# Altium PCB Copy of WoodStoveLayout1.PcbDoc (part 4 of 5)
Units mil, origin at the board's own origin, x right, y up, seen from the top; angles counter-clockwise.
Board outline 4000 x 3000 mil, 4 copper layers (Top Layer, LGND, LPWR, Bottom Layer), stack 64.6 mil thick; 132 components, 92 nets, 551 pads, 393 vias.
Unrouted connection lines stored in the file: 127.
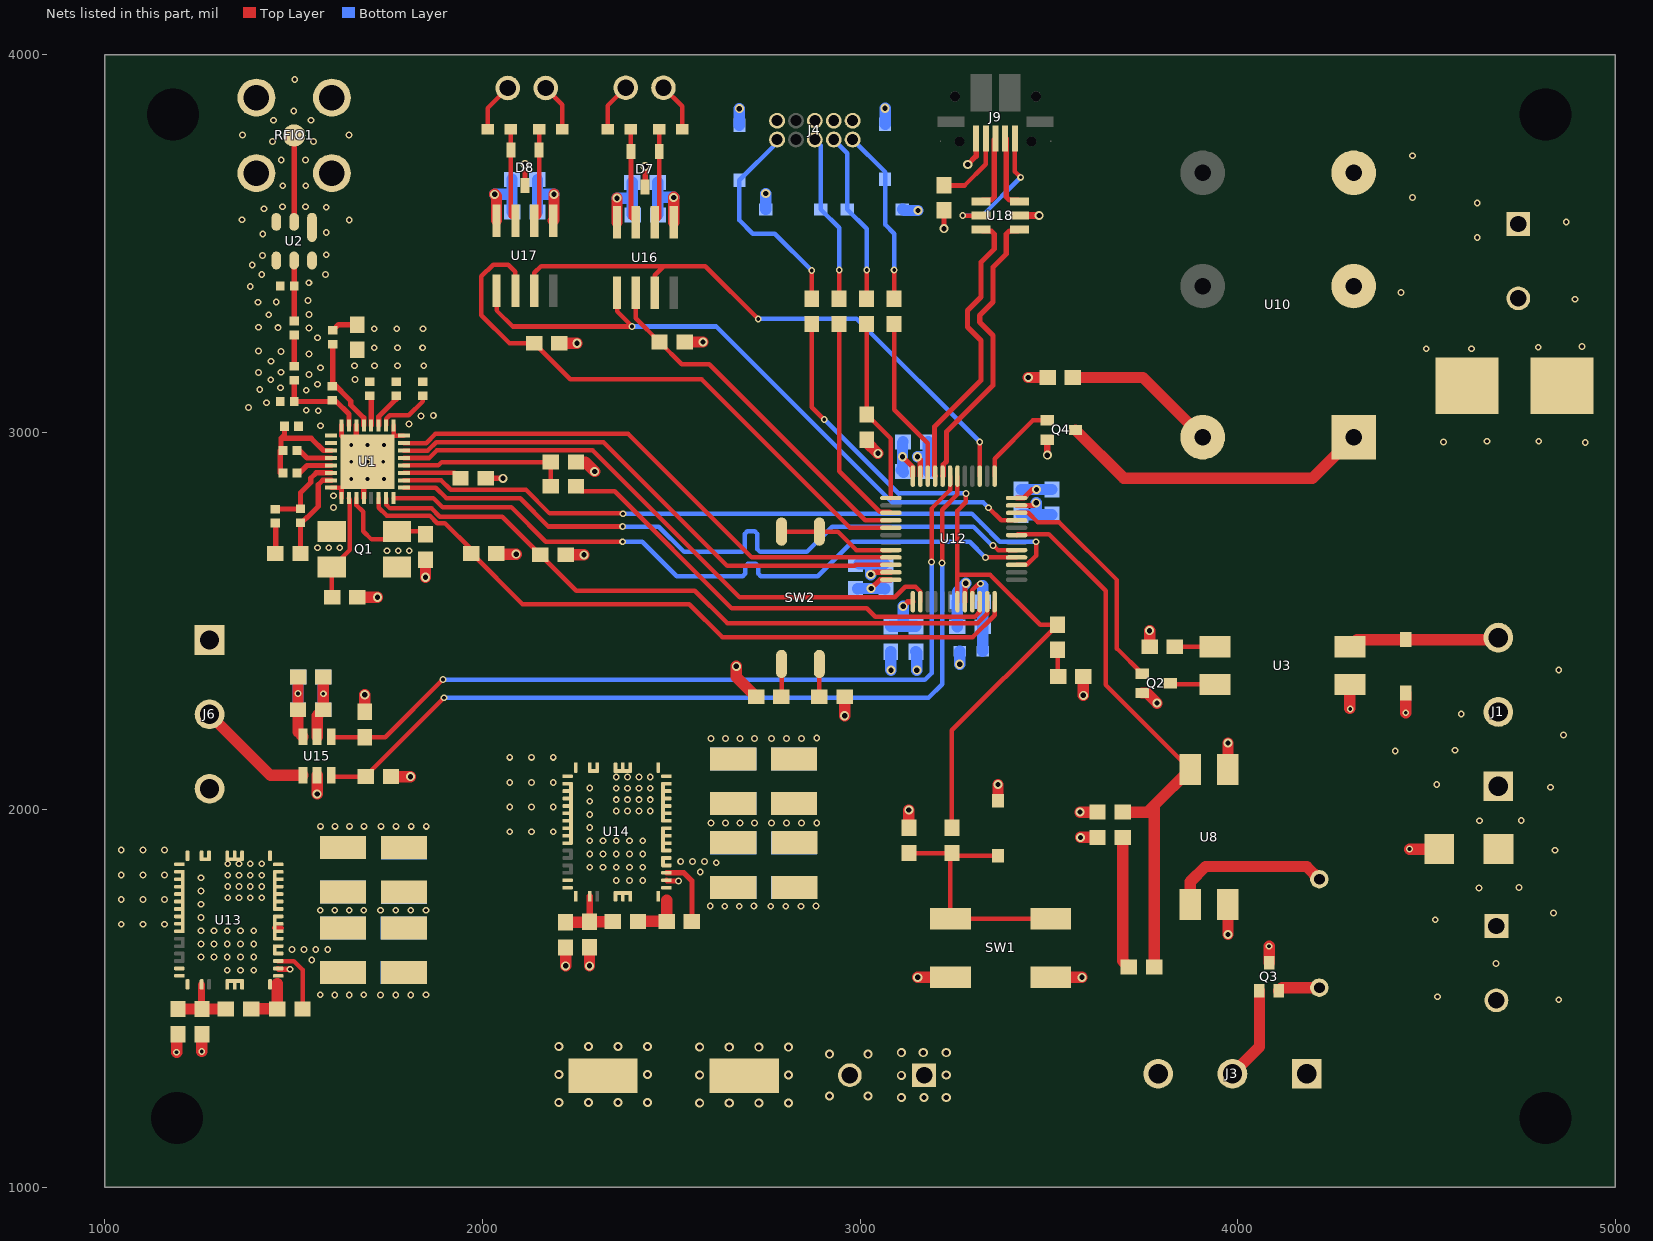
[diagram p4: the nets of this part, all layers, seen from the top]

## Part data (continued)
R11: Case/Package=0603, Case Code (Metric)=1608, Manufacturer=Vishay, Manufacturer Part Number=CRCW060368R0FKEA, Max Operating Temperature=155°C, Max Power Dissipation=100mW, Min Operating Temperature=-55°C, Package Quantity=10, Resistance=68, Supplier Part Number 1=541-68.0HTR-ND, Temperature Coefficient=100ppm/°C, Tolerance=1%, Voltage Rating=75V, Case Code (Imperial)=0603, ComponentLink1Description=https://datasheet.ciiva.com/2494/dcrcwe3-2494368.pdf, ComponentLink1URL=https://datasheet.ciiva.com/2494/dcrcwe3-2494368.pdf, ComponentLink2Description=https://datasheet.ciiva.com/11809/0900766b80d98afc-11809013.pdf, ComponentLink2URL=https://datasheet.ciiva.com/11809/0900766b80d98afc-11809013.pdf, ComponentLink3Description=https://datasheet.ciiva.com/8337/dcrcwe3-8337350.pdf, ComponentLink3URL=https://datasheet.ciiva.com/8337/dcrcwe3-8337350.pdf, ComponentLink4Description=https://datasheet.ciiva.com/7777/1697337-7777608.pdf, ComponentLink4URL=https://datasheet.ciiva.com/7777/1697337-7777608.pdf, ComponentLink5Description=https://datasheet.ciiva.com/16770/70201119-16770904.pdf, ComponentLink5URL=https://datasheet.ciiva.com/16770/70201119-16770904.pdf, ComponentLink6Description=https://datasheet.ciiva.com/2494/dcrcwe3-2494366.pdf, ComponentLink6URL=https://datasheet.ciiva.com/2494/dcrcwe3-2494366.pdf, ComponentLink7Description=https://datasheet.ciiva.com/22870/70201119-22870302.pdf, ComponentLink7URL=https://datasheet.ciiva.com/22870/70201119-22870302.pdf, ComponentLink8Description=https://datasheet.ciiva.com/2494/dcrcwe3-2494367.pdf, ComponentLink8URL=https://datasheet.ciiva.com/2494/dcrcwe3-2494367.pdf, ComponentLink9Description=https://datasheet.ciiva.com/16200/dcrcw-16200591.pdf, ComponentLink9URL=https://datasheet.ciiva.com/16200/dcrcw-16200591.pdf, Composition="Thick Film", Contact Plating=Tin, Depth=0.85mm, Height=0.45mm, Lead Free="Lead Free", Length=1.55mm, Military Standard=Not, Number of Terminations=2, Packaging="Tape and Reel", Power Rating=100mW, Pricing 1="5000=0.00497, 10000=0.00432, 25000=0.00405 (USD)", Radiation Hardening=No, REACH SVHC=Unknown, Stock 1=0, Supplier 1=Digi-Key, Termination=SMD/SMT, Voltage Rating (DC)=75V, Weight=7.1E-05oz, Width=0.033inch
R13 R14 R15 R16 R24 R25: Case/Package=0603, Case Code (Metric)=1608, Manufacturer=Vishay, Manufacturer Part Number=CRCW060322R0FKEA, Max Operating Temperature=155°C, Min Operating Temperature=-55°C, Package Quantity=5000, Power Rating=100mW, Resistance=22R, Supplier Part Number 1=541-22.0HTR-ND, Temperature Coefficient=100ppm/°C, Tolerance=1%, Voltage Rating=75V, Case Code (Imperial)=0603, ComponentLink1Description=https://datasheet.ciiva.com/16382/dcrcwe3-16382261.pdf, ComponentLink1URL=https://datasheet.ciiva.com/16382/dcrcwe3-16382261.pdf, ComponentLink2Description=https://datasheet.ciiva.com/5552/dcrcwe3-109170-5552120.pdf, ComponentLink2URL=https://datasheet.ciiva.com/5552/dcrcwe3-109170-5552120.pdf, ComponentLink3Description=https://datasheet.ciiva.com/22700/1697337-22700361.pdf, ComponentLink3URL=https://datasheet.ciiva.com/22700/1697337-22700361.pdf, ComponentLink4Description=https://datasheet.ciiva.com/11809/0900766b80d98afc-11809067.pdf, ComponentLink4URL=https://datasheet.ciiva.com/11809/0900766b80d98afc-11809067.pdf, ComponentLink5Description=https://datasheet.ciiva.com/7672/1697337-7672876.pdf, ComponentLink5URL=https://datasheet.ciiva.com/7672/1697337-7672876.pdf, ComponentLink6Description=https://datasheet.ciiva.com/15159/getdatasheetpartid-33090-15159388.pdf, ComponentLink6URL=https://datasheet.ciiva.com/15159/getdatasheetpartid-33090-15159388.pdf, ComponentLink7Description=https://datasheet.ciiva.com/7672/1697337-7672877.pdf, ComponentLink7URL=https://datasheet.ciiva.com/7672/1697337-7672877.pdf, ComponentLink8Description=https://datasheet.ciiva.com/26316/fld-crcw-e3-data-en-26316590.pdf, ComponentLink8URL=https://datasheet.ciiva.com/26316/fld-crcw-e3-data-en-26316590.pdf, ComponentLink9Description=https://datasheet.ciiva.com/16893/dcrcw-16893903.pdf, ComponentLink9URL=https://datasheet.ciiva.com/16893/dcrcw-16893903.pdf, Composition="Thick Film", Contact Plating=Tin,Lead, Depth=0.85mm, Height=0.45mm, Lead Free="Lead Free", Length=1.55mm, Military Standard=Not, Mount="Surface Mount", Packaging="Tape and Reel", Pricing 1="5000=0.00497, 10000=0.00432, 25000=0.00405 (USD)", Radiation Hardening=No, REACH SVHC=Unknown, Stock 1=0, Supplier 1=Digi-Key, Termination=SMD/SMT, Voltage Rating (DC)=75V, Weight=7.1E-05oz, Width=0.85mm
R22: Case/Package=0603, Case Code (Metric)=1608, Manufacturer=Vishay, Manufacturer Part Number=CRCW060310R0FKEA, Max Operating Temperature=155°C, Max Power Dissipation=100mW, Min Operating Temperature=-55°C, Package Quantity=10, Supplier Part Number 1=541-10.0HTR-ND, Temperature Coefficient=100ppm/°C, Tolerance=1%, Voltage Rating=75V, Case Code (Imperial)=0603, ComponentLink1Description=https://datasheet.ciiva.com/2465/dcrcwe3-2465699.pdf, ComponentLink1URL=https://datasheet.ciiva.com/2465/dcrcwe3-2465699.pdf, ComponentLink2Description=https://datasheet.ciiva.com/2465/dcrcwe3-2465700.pdf, ComponentLink2URL=https://datasheet.ciiva.com/2465/dcrcwe3-2465700.pdf, ComponentLink3Description=https://datasheet.ciiva.com/11808/0900766b80d98afc-11808660.pdf, ComponentLink3URL=https://datasheet.ciiva.com/11808/0900766b80d98afc-11808660.pdf, ComponentLink4Description=https://datasheet.ciiva.com/2465/dcrcwe3-2465701.pdf, ComponentLink4URL=https://datasheet.ciiva.com/2465/dcrcwe3-2465701.pdf, ComponentLink5Description=https://datasheet.ciiva.com/16740/dcrcwe3-16740661.pdf, ComponentLink5URL=https://datasheet.ciiva.com/16740/dcrcwe3-16740661.pdf, ComponentLink6Description=https://datasheet.ciiva.com/26316/fld-crcw-e3-data-en-26316582.pdf, ComponentLink6URL=https://datasheet.ciiva.com/26316/fld-crcw-e3-data-en-26316582.pdf, ComponentLink7Description=https://datasheet.ciiva.com/16781/70201119-16781847.pdf, ComponentLink7URL=https://datasheet.ciiva.com/16781/70201119-16781847.pdf, ComponentLink8Description=https://datasheet.ciiva.com/3256/dcrcwe3-3256955.pdf, ComponentLink8URL=https://datasheet.ciiva.com/3256/dcrcwe3-3256955.pdf, ComponentLink9Description=https://datasheet.ciiva.com/5547/dcrcwe3-109170-5547342.pdf, ComponentLink9URL=https://datasheet.ciiva.com/5547/dcrcwe3-109170-5547342.pdf, ComponentLink10Description=https://datasheet.ciiva.com/22673/1697337-22673071.pdf, ComponentLink10URL=https://datasheet.ciiva.com/22673/1697337-22673071.pdf, Composition="Thick Film", Contact Plating=Tin, Depth=0.85mm, Height=0.45mm, Lead Free="Lead Free", Length=1.55mm, Military Standard=Not, Mount="Surface Mount", Number of Pins=2, Number of Terminations=2, Packaging="Tape and Reel", Power Rating=100mW, Pricing 1="5000=0.00497, 10000=0.00432, 25000=0.00405 (USD)", REACH SVHC=Unknown, Resistance=10, Stock 1=0, Supplier 1=Digi-Key, Termination=SMD/SMT, Voltage Rating (DC)=75V, Weight=7.1E-05oz, Width=0.033inch
R29: Case/Package=0603, Case Code (Metric)=1608, Manufacturer="Vishay Dale", Manufacturer Part Number=M55342E12B40B2RWS, Max Operating Temperature=150°C, Max Power Dissipation=100mW, Min Operating Temperature=-55°C, Package Quantity=1, Resistance=40.2k, Supplier Part Number 1=M55342E12B40B2RWS-MIL, Temperature Coefficient=25ppm/°C, Tolerance=0.1%, Case Code (Imperial)=0603, ComponentLink1Description=https://datasheet.ciiva.com/16884/crcwhpe3-16884389.pdf, ComponentLink1URL=https://datasheet.ciiva.com/16884/crcwhpe3-16884389.pdf, ComponentLink2Description=https://datasheet.ciiva.com/9010/crcwhpe3-9010219.pdf, ComponentLink2URL=https://datasheet.ciiva.com/9010/crcwhpe3-9010219.pdf, ComponentLink3Description=https://datasheet.ciiva.com/2527/crcwhpe3-2527276.pdf, ComponentLink3URL=https://datasheet.ciiva.com/2527/crcwhpe3-2527276.pdf, ComponentLink4Description=https://datasheet.ciiva.com/2527/crcwhpe3-2527277.pdf, ComponentLink4URL=https://datasheet.ciiva.com/2527/crcwhpe3-2527277.pdf, ComponentLink5Description=https://datasheet.ciiva.com/2527/crcwhpe3-2527278.pdf, ComponentLink5URL=https://datasheet.ciiva.com/2527/crcwhpe3-2527278.pdf, ComponentLink6Description=http://www.vishay.com/docs/60018/eh.pdf, ComponentLink6URL=http://www.vishay.com/docs/60018/eh.pdf, Composition="Thin Film", Failure Rate=0.01%, Height=0.033inch, Length=0.064inch, Number of Terminations=2, Packaging=Tray, Stock 1=0, Supplier 1=Digi-Key, Width=0.032inch
R30: Case/Package=0603, Case Code (Metric)=1608, Manufacturer="TE Connectivity", Manufacturer Part Number=8-2176089-5, Max Operating Temperature=155°C, Max Power Dissipation=167mW, Min Operating Temperature=-55°C, Package Quantity=1, Resistance=88.7k, Supplier Part Number 1=A110295TR-ND, Temperature Coefficient=25ppm/°C, Tolerance=0.1%, Case Code (Imperial)=0603, ComponentLink1Description=https://datasheet.ciiva.com/41810/eng-ds-1773272-j-41810143.pdf, ComponentLink1URL=https://datasheet.ciiva.com/41810/eng-ds-1773272-j-41810143.pdf, ComponentLink2Description=https://datasheet.ciiva.com/41821/eng-ds-1773272-j-41821583.pdf, ComponentLink2URL=https://datasheet.ciiva.com/41821/eng-ds-1773272-j-41821583.pdf, Composition="Thin Film", Height=0.022inch, Length=0.061inch, Number of Terminations=2, Packaging="Tape and Reel", Pricing 1="1000=0.14518, 2000=0.1432 (USD)", Stock 1=0, Supplier 1=Digi-Key, Width=0.031inch
R32: Case/Package=0603, Case Code (Metric)=1608, Manufacturer="TE Connectivity", Manufacturer Part Number=3-2176089-1, Max Operating Temperature=155°C, Max Power Dissipation=167mW, Min Operating Temperature=-55°C, Package Quantity=1000, Power Rating=166mW, Resistance=23.2kR, Supplier Part Number 1=A110239TR-ND, Temperature Coefficient=25ppm/°C, Tolerance=0.1%, Voltage Rating=100V, Case Code (Imperial)=0603, ComponentLink1Description=https://datasheet.ciiva.com/41825/eng-ds-1773272-j-41825125.pdf, ComponentLink1URL=https://datasheet.ciiva.com/41825/eng-ds-1773272-j-41825125.pdf, ComponentLink2Description=https://datasheet.ciiva.com/41807/eng-ds-1773272-j-41807015.pdf, ComponentLink2URL=https://datasheet.ciiva.com/41807/eng-ds-1773272-j-41807015.pdf, ComponentLink3Description=https://datasheet.ciiva.com/41818/eng-ds-1773272-j-41818073.pdf, ComponentLink3URL=https://datasheet.ciiva.com/41818/eng-ds-1773272-j-41818073.pdf, Composition="Thin Film", Height=0.022inch, Length=0.061inch, Mount="Surface Mount", Number of Terminations=2, Packaging="Cut Tape", Pricing 1="1000=0.14518, 2000=0.1432 (USD)", REACH SVHC="No SVHC", Stock 1=1000, Supplier 1=Digi-Key, Voltage Rating (DC)=100V, Width=0.031inch
R33: Case/Package=0603, Case Code (Metric)=1608, Manufacturer="TE Connectivity", Manufacturer Part Number=2176090-2, Max Operating Temperature=155°C, Max Power Dissipation=167mW, Min Operating Temperature=-55°C, Package Quantity=1000, Resistance=133kR, Supplier Part Number 1=A110312TR-ND, Temperature Coefficient=25ppm/°C, Tolerance=0.1%, Case Code (Imperial)=0603, ComponentLink1Description=https://datasheet.ciiva.com/41823/eng-ds-1773272-j-41823608.pdf, ComponentLink1URL=https://datasheet.ciiva.com/41823/eng-ds-1773272-j-41823608.pdf, ComponentLink2Description=https://datasheet.ciiva.com/41810/eng-ds-1773272-j-41810377.pdf, ComponentLink2URL=https://datasheet.ciiva.com/41810/eng-ds-1773272-j-41810377.pdf, ComponentLink3Description=https://datasheet.ciiva.com/41824/eng-ds-1773272-j-41824430.pdf, ComponentLink3URL=https://datasheet.ciiva.com/41824/eng-ds-1773272-j-41824430.pdf, Composition="Thin Film", Depth=0.8mm, Height=0.022inch, Length=0.061inch, Military Standard=Not, Number of Terminations=2, Packaging="Tape and Reel", Pricing 1="1000=0.14518, 2000=0.1432 (USD)", Stock 1=0, Supplier 1=Digi-Key, Width=0.031inch
R39: Case/Package=0603, Case Code (Metric)=1608, Manufacturer=Panasonic, Manufacturer Part Number=ERJ-3EKF1502V, Max Operating Temperature=155°C, Max Power Dissipation=100mW, Min Operating Temperature=-55°C, Package Quantity=1, Resistance=15k, Supplier Part Number 1=P15.0KHTR-ND, Temperature Coefficient=100ppm/°C, Tolerance=1%, Voltage Rating=75V, Case Code (Imperial)=0603, ComponentLink1Description=https://datasheet.ciiva.com/16770/70260748-16770997.pdf, ComponentLink1URL=https://datasheet.ciiva.com/16770/70260748-16770997.pdf, ComponentLink2Description=https://datasheet.ciiva.com/7830/426256-7830982.pdf, ComponentLink2URL=https://datasheet.ciiva.com/7830/426256-7830982.pdf, ComponentLink3Description=https://datasheet.ciiva.com/24026/aoa0000ce2-24026054.pdf, ComponentLink3URL=https://datasheet.ciiva.com/24026/aoa0000ce2-24026054.pdf, ComponentLink4Description=https://datasheet.ciiva.com/6138/aoa0000ce2-6138183.pdf, ComponentLink4URL=https://datasheet.ciiva.com/6138/aoa0000ce2-6138183.pdf, ComponentLink5Description=https://datasheet.ciiva.com/48530/aoa0000ce2-48530983.pdf, ComponentLink5URL=https://datasheet.ciiva.com/48530/aoa0000ce2-48530983.pdf, ComponentLink6Description=https://datasheet.ciiva.com/9193/aoa0000ce2-9193001.pdf, ComponentLink6URL=https://datasheet.ciiva.com/9193/aoa0000ce2-9193001.pdf, ComponentLink7Description=https://datasheet.ciiva.com/16762/70260748-16762729.pdf, ComponentLink7URL=https://datasheet.ciiva.com/16762/70260748-16762729.pdf, ComponentLink8Description=https://datasheet.ciiva.com/22722/426256-22722779.pdf, ComponentLink8URL=https://datasheet.ciiva.com/22722/426256-22722779.pdf, ComponentLink9Description=https://datasheet.ciiva.com/7830/aoa0000ce2-7830732.pdf, ComponentLink9URL=https://datasheet.ciiva.com/7830/aoa0000ce2-7830732.pdf, ComponentLink10Description=https://datasheet.ciiva.com/46372/1678782-46372846.pdf, ComponentLink10URL=https://datasheet.ciiva.com/46372/1678782-46372846.pdf, ComponentLink11Description=https://datasheet.ciiva.com/46372/1678782-46372847.pdf, ComponentLink11URL=https://datasheet.ciiva.com/46372/1678782-46372847.pdf, Composition="Thick Film", Contact Plating=Tin, Depth=0.8mm, Height=0.022inch, Lead Free="Lead Free", Length=1.6mm, Military Standard=Not, Mount="Surface Mount", Number of Pins=2, Number of Terminations=2, Packaging="Tape and Reel", Power Rating=100mW, Pricing 1="5000=0.00751, 10000=0.00653, 25000=0.00573, 50000=0.00526, 125000=0.00515 (USD)", Radiation Hardening=No, REACH SVHC="No SVHC", Stock 1=0, Supplier 1=Digi-Key, Termination=SMD/SMT, Voltage Rating (DC)=75V, Width=0.031inch
RFIO1: "RF Connector SMA Straight PCB Jack Surface Mount 50 Ohm", Part No=132134-15
SW1: Case/Package=SMD/SMT, Contact Current Rating=50mA, Contact Resistance=100mR, IP Rating="IP67,Waterproof,Dust Tight", Manufacturer=Omron, Max Operating Temperature=70°C, Max Voltage Rating (DC)=24V, Min Operating Temperature=-25°C, Operating Force=1.57N, Package Quantity=1, Supplier Part Number 1=SW261TR-ND, ComponentLink1Description=https://datasheet.ciiva.com/1532/en-b3sn-1532676.pdf, ComponentLink1URL=https://datasheet.ciiva.com/1532/en-b3sn-1532676.pdf, ComponentLink2Description=https://datasheet.ciiva.com/16154/en-b3sn-16154998.pdf, ComponentLink2URL=https://datasheet.ciiva.com/16154/en-b3sn-16154998.pdf, ComponentLink3Description=https://datasheet.ciiva.com/2900/b3sn-1110-2900023.pdf, ComponentLink3URL=https://datasheet.ciiva.com/2900/b3sn-1110-2900023.pdf, ComponentLink4Description=https://datasheet.ciiva.com/5283/en-b3sn-371257-5283623.pdf, ComponentLink4URL=https://datasheet.ciiva.com/5283/en-b3sn-371257-5283623.pdf, ComponentLink5Description=https://datasheet.ciiva.com/2900/b3sn-1110-2900024.pdf, ComponentLink5URL=https://datasheet.ciiva.com/2900/b3sn-1110-2900024.pdf, ComponentLink6Description=https://datasheet.ciiva.com/2900/b3sn-1110-2900025.pdf, ComponentLink6URL=https://datasheet.ciiva.com/2900/b3sn-1110-2900025.pdf, ComponentLink7Description=https://datasheet.ciiva.com/15183/getdatasheetpartid-87284-15183738.pdf, ComponentLink7URL=https://datasheet.ciiva.com/15183/getdatasheetpartid-87284-15183738.pdf, ComponentLink8Description=https://datasheet.ciiva.com/30076/en-b3sn-30076973.pdf, ComponentLink8URL=https://datasheet.ciiva.com/30076/en-b3sn-30076973.pdf, Contact Material=Gold, Contact Plating=Gold, Current Rating=50mA, Depth=7mm, Electrical Life=50000Cycles, Height=3.1mm, Illumination Type=Non-Illuminated,Illuminated, Lead Free="Contains Lead", Length=6.5mm, Manufacturer Part Number=B3SN-3012P, Max Current Rating=50mA, Mechanical Life=100000Cycles, Mount="Surface Mount", Number of Poles=1, Orientation=Straight, Packaging="Tape and Reel", Pricing 1="3000=0.52365 (USD)", Radiation Hardening=No, REACH SVHC=Unknown, Stock 1=48000, Supplier 1=Digi-Key, Switch Function=Off-Mom, Switch Travel=0.25mm, Termination=SMD/SMT, Throw Configuration=SPST, Voltage Rating (DC)=24V, Weight=0.007055oz
SW2: Current Rating=100mA, Manufacturer=CTS, Manufacturer Part Number=219-2MSTR, Max Operating Temperature=85°C, Max Voltage Rating (DC)=20V, Min Operating Temperature=-55°C, Package Quantity=1000, Supplier Part Number 1=CT3114TR-ND, ComponentLink1Description=https://datasheet.ciiva.com/15210/getdatasheetpartid-92384-15210150.pdf, ComponentLink1URL=https://datasheet.ciiva.com/15210/getdatasheetpartid-92384-15210150.pdf, ComponentLink2Description=https://datasheet.ciiva.com/8679/219-8679450.pdf, ComponentLink2URL=https://datasheet.ciiva.com/8679/219-8679450.pdf, ComponentLink3Description=https://datasheet.ciiva.com/16316/219-16316219.pdf, ComponentLink3URL=https://datasheet.ciiva.com/16316/219-16316219.pdf, Contact Material=Copper, Contact Plating=Tin,Gold, Depth=9.91mm, Electrical Life=2000Cycles, Lead Free="Lead Free", Length=0.258inch, Max Current Rating=100mA, Mechanical Life=2000Cycles, Mount="Surface Mount", Number of Positions=2, Orientation=Straight, Packaging="Tape and Reel", Pitch=0.1inch, Pricing 1="1000=0.441, 5000=0.3591 (USD)", Radiation Hardening=No, Stock 1=16000, Supplier 1=Digi-Key, Terminal Pitch=2.54mm, Termination="Gull Wing", Throw Configuration=SPST, Voltage Rating (DC)=20V, Washable=Yes
U1: "SX1211I084"
U3 U8: "OPTOISOLATOR 5KV TRANSISTOR 4SMD 20mA/1.2V saturation", Case/Package=SMD/SMT, Collector Emitter Saturation Voltage=200mV, Current Transfer Ratio=600%, Forward Current=50mA, Forward Voltage=1.4V, Isolation Voltage=5kV, Manufacturer="ON Semiconductor / Fairchild", Max Operating Temperature=110°C, Max Output Voltage=70V, Max Power Dissipation=200mW, Min Operating Temperature=-55°C, Package Quantity=1, Reverse Breakdown Voltage=6V, Supplier Part Number 1=FOD817D3SDTR-ND, Collector Emitter Voltage (VCEO)=200mV, ComponentLink1Description=https://datasheet.ciiva.com/25620/0900766b810e24fa-25620565.pdf, ComponentLink1URL=https://datasheet.ciiva.com/25620/0900766b810e24fa-25620565.pdf, ComponentLink2Description=https://datasheet.ciiva.com/26122/fod817d-26122105.pdf, ComponentLink2URL=https://datasheet.ciiva.com/26122/fod817d-26122105.pdf, ComponentLink3Description=https://datasheet.ciiva.com/15118/getdatasheetpartid-67082-15118458.pdf, ComponentLink3URL=https://datasheet.ciiva.com/15118/getdatasheetpartid-67082-15118458.pdf, ComponentLink4Description=https://datasheet.ciiva.com/2086/fod817d-2086155.pdf, ComponentLink4URL=https://datasheet.ciiva.com/2086/fod817d-2086155.pdf, ComponentLink5Description=https://datasheet.ciiva.com/46433/1563587-46433595.pdf, ComponentLink5URL=https://datasheet.ciiva.com/46433/1563587-46433595.pdf, ComponentLink6Description=https://datasheet.ciiva.com/2086/fod817d-2086156.pdf, ComponentLink6URL=https://datasheet.ciiva.com/2086/fod817d-2086156.pdf, ComponentLink7Description=https://datasheet.ciiva.com/2086/fod817d-2086157.pdf, ComponentLink7URL=https://datasheet.ciiva.com/2086/fod817d-2086157.pdf, ComponentLink8Description=https://datasheet.ciiva.com/8095/fod817d-8095549.pdf, ComponentLink8URL=https://datasheet.ciiva.com/8095/fod817d-8095549.pdf, ComponentLink9Description=https://datasheet.ciiva.com/4701/fod817d-4701711.pdf, ComponentLink9URL=https://datasheet.ciiva.com/4701/fod817d-4701711.pdf, ComponentLink10Description=https://datasheet.ciiva.com/17001/fod817-17001647.pdf, ComponentLink10URL=https://datasheet.ciiva.com/17001/fod817-17001647.pdf, Fall Time=18000ns, Input Current=50mA, Lead Free="Lead Free", Manufacturer Part Number=FOD817D3SD, Max Collector Current=50mA, Max Input Current=50mA, Mount="Surface Mount", Number of Channels=1, Number of Circuits=1, Number of Elements=1, Number of Pins=4, Output Current per Channel=50mA, Output Voltage=70V, Packaging="Tape and Reel", Power Dissipation=200mW, Pricing 1="1000=0.15939, 2000=0.14611, 5000=0.13283, 10000=0.12397, 25000=0.11954, 50000=0.11512 (USD)", Radiation Hardening=No, REACH SVHC="No SVHC", Rise Time=18000ns, Stock 1=123000, Supplier 1=Digi-Key, Weight=0g
U5: "DIODE SCHOTTKY 40V 1A SOD123"
U10: "RELAY GENERAL PURPOSE DPST 8A 3V 67mA coil drive 45ohm coil resistance"
U11: Case/Package=SMD/SMT, Current Rating=2A, DC Cold Resistance=39mR, Manufacturer=Bel, Manufacturer Part Number=SSQ2, Max Operating Temperature=125°C, Min Operating Temperature=-55°C, Supplier Part Number 1=507-1048-2-ND, Voltage Rating (AC)=125V, Approvals=CSA,CE,cULus, ComponentLink1Description=https://datasheet.ciiva.com/300/ssq-300722.pdf, ComponentLink1URL=https://datasheet.ciiva.com/300/ssq-300722.pdf, ComponentLink2Description=https://datasheet.ciiva.com/300/ssq-300723.pdf, ComponentLink2URL=https://datasheet.ciiva.com/300/ssq-300723.pdf, ComponentLink3Description=https://datasheet.ciiva.com/300/ssq-300724.pdf, ComponentLink3URL=https://datasheet.ciiva.com/300/ssq-300724.pdf, Fuse Type="Board Mount (Cartridge Style Excluded)", Height=0.1inch, Length=0.24inch, Mount="Surface Mount", Packaging="Tape and Reel", Pricing 1="1000=0.15908, 2000=0.14847, 3000=0.14582, 5000=0.14317, 10000=0.13787 (USD)", Stock 1=59000, Supplier 1=Digi-Key, Voltage Rating (DC)=125V, Width=0.1inch
U12: library part STM32L433CCTx
U13 U14: "4V to 36V, 2A Step-Down DC/DC Power Module"
U15: "Self-Calibrating, 16-Bit Analog-to-Digital Converter 6-SOT-23 -40 to 85"
U16 U17: "K type thermocouple amplifier"
U18: "2-Channel Ultra Low Clamp Voltage ESD Solution with Series-Resistor Isolation 6-SOT-23 -40 to 85", Package="SOT-23-6 Texas Instruments", Availability=Good, MF="Texas Instruments", MP=TPD2S017DBVR, Price="0.32 USD", SnapEDA_Link=https://www.snapeda.com/parts/TPD2S017DBVR/Texas%20Instruments/view-part/?ref=snap

## Free pads (board coordinates)
  round 60 hole 137.8 unplated: 2(1180,3842) 2(1191,1184) 2(4815,1184) 2(4815,3842)

## Via types
v1: diameter 18, hole 10, Top Layer to Bottom Layer, 308 vias
v2: diameter 24, hole 14, Top Layer to Bottom Layer, 85 vias

## Nets (pads, with @x,y where several pads share a name; then routed paths per layer and width w, separated by ;. In a path a pad name is that pad's centre, name@x,y a point inside that pad or via, vN(x,y) a via of type N, cw(c..) or ccw(c..) an arc to the next point about the centre after c; other vN are vias at no path point)
3VSWRelief: U14.9 U14.10 U14.11
  other v1: 2072,1942 2129.5,1942 2187,1942 2072,2007.33 2129.5,2007.33 2187,2007.33 2072,2072.67 2129.5,2072.67 2187,2072.67 2072,2139 2129.5,2139 2187,2139
"5V PWM": J1.3 U3.4 U5.C | length 403.4
  Top Layer w30: U3.4@4296.74,2432 4315.61,2450.87 U5.C@4445,2450.87 4684.81,2450.87 J1.3@4690.09,2456.15
5VSWRelief: U13.9 U13.10 U13.11
  other v1: 1043,1697 1100.5,1697 1158,1697 1043,1762.33 1100.5,1762.33 1158,1762.33 1043,1827.67 1100.5,1827.67 1158,1827.67 1043,1894 1100.5,1894 1158,1894
12VFAN: D9.1 J1.1 J2.1
  other v1: 4523,1709 4836,1727 4639,1793 4745,1794.57 4840,1893 4640,1970.94 4751,1972 4828,2059.59 4527,2067
+3V3: C1.2 C16.2 C17.2 C18.2 C19.2 C20.2 C21.2 C22.2 C23.2 C39.2 C40.2 C41.2 C42.2 C43.2 C48.2 C49.2 C50.2 C51.2 FB1.1 J4.1 R1.2 R4.2 R5.2 R8.1 R10.2 R11.1 R17.2 R22.2 R23.2 R27.2 R32.2 R35.2 R36.2 R37.2 R38.2 U1.26 U12.1 U12.24 U12.36 U12.48 U14.6 U14.7 U14.8 U16.4 U17.4 | length 1987.5
  Top Layer w12: U1.26@1744.54,3018.21 1744.54,3035.34 1754.35,3045.15 1804.95,3045.15 1841.33,3081.53 C1.2@1841.33,3096.49
  Top Layer w14: v2(3029,2586) 3052.3,2609.3 U12.48@3081.52,2609.3 ; v2(3111.93,2935) 3139.59,2907.34 U12.36@3139.59,2883.91 ; v2(3114,2539) 3126.23,2551.23 U12.1@3139.59,2551.23 ; U12.24@3414.2,2825.84 3433.31,2825.84 3455.93,2848.46 v2(3467,2848.46)
  Top Layer w30: R36.2@1688,2259.46 v2(1688,2304.86) ; R35.2@1757.46,2088 v2(1809.08,2088) ; v2(2032,3630) 2037.09,3624.91 U17.4@2037.09,3560.61 ; R4.2@2036.56,2679.06 2038.62,2677 v2(2089,2677) ; R38.2@2203.56,3235.67 v2(2250.33,3235.67) ; v2(2220.06,1586.94) C39.2@2220.06,1635.54 ; R5.2@2220.06,2675.39 v2(2268.61,2675.39) ; R1.2@2247.56,2921.06 2271.94,2921.06 v2(2297,2896) ; v2(2283,1586.94) R32.2@2283,1636.54 ; U16.4@2356.09,3555.61 v2(2356.09,3619.91) ; R37.2@2535.46,3239 v2(2584,3239) ; v2(2672,2380) 2672,2351.97 R27.2@2724.4,2299.57 ; R17.2@3017.42,2980.01 3017.42,2973.58 v2(3047,2944) ; R23.2@3129,1952.46 v2(3129,1999.59) ; v2(3445.29,3145) R22.2@3496.54,3145 ; v2(3582,1994) R10.2@3628.54,1994 ; v2(3583.34,1927) R11.1@3628.54,1927 ; R8.1@3766.54,2432 v2(3766.54,2474.54)
  Bottom Layer w30: v2(2032,3630) 2077.97,3630 ; C51.2@2077.97,3584.27 2077.97,3630 ; C50.2@2077.97,3669.61 2077.97,3630 ; v2(2356.09,3619.91) 2396.54,3619.91 2396.63,3620 ; C49.2@2396.63,3576.61 2396.63,3620 ; C48.2@2396.63,3661.61 2396.63,3620 ; C21.2@2992.86,2585.11 2993.75,2586 v2(3029,2586) 3064.96,2586 C17.2@3065.85,2585.11 ; C20.2@3080.86,2486.04 3114,2486.04 ; C22.2@3113.4,2974.49 3111.93,2973.03 v2(3111.93,2935) 3111.93,2902.89 3109,2899.97 C18.2@3113.4,2895.57 C18.2@3115,2893.97 ; v2(3114,2539) 3114,2486.04 ; C16.2@3147.59,2486.04 3114,2486.04 ; v2(3263.49,2385.49) FB1.1@3263.49,2420 ; C19.2@3425.86,2848.31 3426.02,2848.46 v2(3467,2848.46) C23.2@3507,2848.46
  other v1: 2354,1997 2384,1997 2414,1997 2444,1997 2354,2027 2384,2027 2414,2027 2444,2027 2354,2057 2384,2057 2414,2057 2444,2057 2354,2087 2384,2087 2414,2087 2444,2087 2605,2189 2643.5,2189 2681.99,2189 2720.49,2189 2765,2189 2805,2189 2845,2189 2885,2190.26 1804.95,3022 1837,3043 1869.7,3044
+5V: C29.2 C30.2 C31.2 C32.2 C33.2 C44.2 C45.2 C46.2 C47.2 J6.1 R29.2 U13.6 U13.7 U13.8 U15.5 | length 345.2
  Top Layer w30: v1(1189.8,1358) C29.2@1189.8,1405.54 ; v1(1256.48,1360) R29.2@1256.48,1405.98 ; U15.5@1562,2193.66 1562,2249 C45.2@1578,2265 v1@1578,2307.39 ; v1(1578.39,2307.39) C44.2@1578.39,2351.48
  Bottom Layer w30: C46.2@1578,2265 1578.39,2265.39 v1(1578.39,2307.39) ; v1@1578,2307 v1(1578.39,2307.39) ; C47.2@1578.39,2351.48 v1(1578.39,2307.39)
  other v1: 1325,1767 1355,1767 1385,1767 1415,1767 1325,1797 1355,1797 1385,1797 1415,1797 1325,1827 1355,1827 1385,1827 1415,1827 1325,1857 1355,1857 1385,1857 1415,1857 1571,1956.26 1609.5,1956.26 1647.99,1956.26 1686,1956.26 1731,1956.26 1771,1956.26 1811,1956.26 1851,1956.26
+12V: C25.2 C26.2 C27.2 C28.2 C34.1 C35.2 C36.2 C37.2 C38.2 J3.1 J10.2 Q3.3 U13.2 U13.4 U14.2 U14.4 | length 107.1
  Top Layer w14: U13.2@1457.7,1579.95 1457.75,1580 1459.75,1578 v1(1490,1578) ; U14.2@2486.91,1813.46 U14.2@2486.95,1813.51 ; U14.2@2488.95,1811.51 v1(2519.2,1811.51)
  Top Layer w30: Q3.3@4083,1595.4 v1(4083,1639)
  other v1: 1570,1510.1 1608.5,1510 1646.99,1510 1685.49,1510.1 1730,1510 1770,1510 1810,1510 1850,1510.1 1547.57,1602.15 1495.4,1630 1526.93,1630 1558.47,1630 1590,1630 2603,1745 2641.5,1744.9 2679.99,1744.9 2718.49,1745 2763,1744.9 2803,1744.9 2843,1744.9 2883,1745 2576.78,1835.66 2619,1860 2524.6,1863.51 2556.14,1863.51 2587.67,1863.51
  other v2: 2575,1223.5 2653.33,1223.5 2731.67,1223.5 2810,1223.5 2919,1242 3021,1242 2575,1297.75 2810,1297.75 2919,1353 3021,1353 2575,1372 2653.33,1371.5 2731.67,1371.5 2810,1371.5
"AC In": J5.2 U11.1
  other v1: 4920,2973 4797,2976 4796,3225 4912,3227 4893,3352
"AC Out": J5.1 U10.4
  other v1: 4634,3516 4870,3557 4634,3607 4463,3622 4463,3732
ACFUSE: U10.3 U11.2
  other v1: 4545,2974.36 4660,2976 4499,3221 4619,3221 4432,3370
DoorSig: J3.2 Q3.1 | length 249.2
  Top Layer w30: J3.2@3986,1301 4057.41,1372.41 Q3.1@4057.41,1520.6
FANGND: D9.2 J1.2 J2.2 U3.3 U5.A | length 194.1
  Top Layer w30: v1@4296.74,2268.26 U3.3@4296.74,2332 ; v1(4444.82,2257) 4445,2257.18 U5.A@4445,2309.13 ; v1(4455.16,1896) D9.2@4533.26,1896
  other v1: 4850,1497 4529,1505 4684,1593 4417,2156 4575,2158 4863,2198 4592,2254 4298,2267 4850,2370
GND: C1.1 C2.1 C3.1 C4.2 C6.1 C7.1 C8.1 C11.1 C14.1 C15.1 C16.1 C17.1 C18.1 C19.1 C20.1 C21.1 C22.1 C23.1 C25.1 C26.1 C27.1 C28.1 C30.1 C31.1 C32.1 C33.1 C34.2 C35.1 C36.1 C37.1 C38.1 C40.1 C41.1 C42.1 C43.1 C44.1 C45.1 C46.1 C47.1 C48.1 C49.1 C50.1 C51.1 D2.A D3.A D4.A D5.A D6.A D7.3 D8.3 J3.3 J4.3 J4.5 J4.9 J6.3 J9.5 J10.1 Q1.2 Q1.4 Q2.2 Q4.2 R3.1 R7.1 R25.2 R28.1 R39.1 RFIO1.P1 RFIO1.P2 RFIO1.P3 RFIO1.P4 SW1.3 SW1.4 U1.0 U1.1 U1.2 U1.8 U1.9 U1.12 U1.24 U1.25 U1.30 U1.32 U2.1 U2.3 U2.4 U2.6 U8.2 U8.3 U12.8 U12.23 U12.35 U12.47 U13.5 U13.14 U13.15 U13.18 U14.5 U14.14 U14.15 U14.18 U15.2 U15.6 U16.1 U17.1 U18.2 | length 3122.7
  Top Layer w12: U1.8@1599.07,2853.05 U1.0@1626.43,2853.05 ; U1.9@1626.43,2825.69 U1.0@1626.43,2853.05 ; U1.0@1685.49,2912.11 U1.0@1626.43,2853.05 ; U1.0@1757.19,2983.81 U1.0@1764.23,2990.85 ; U1.25@1764.23,3018.21 U1.0@1764.23,2990.85 ; U1.24@1791.59,2990.85 U1.0@1764.23,2990.85
  Top Layer w14: U13.5@1448.84,1687.04 1448.96,1687.16 1466.56,1687.16 ; U1.32@1626.43,3018.21 1626.43,2990.85 U1.0@1665.8,2951.48 ; U1.30@1665.8,3018.21 U1.0@1665.8,2951.48 ; U1.12@1685.49,2825.69 1685.49,2912.11 v1(1695.33,2921.95) U1.0@1665.8,2951.48 ; R3.1@2008.56,2878.06 v2(2053.94,2878.06) ; D8.3@2112.49,3653.12 v2(2112.49,3709.51) ; D7.3@2430.49,3649.12 v2(2430.49,3703.51) ; v2(3028,2623) 3033.99,2628.99 U12.47@3081.52,2628.99 ; v2(3152,2935) 3159.28,2927.72 U12.35@3159.28,2883.91 ; v2(3222.14,3539.24) R39.1@3222.14,3587.54 ; U12.8@3277.39,2551.23 3277.39,2597.39 v2(3280,2600) ; v2(3285,3709) 3307.26,3731.26 J9.5@3307.26,3777.92 ; U12.23@3414.2,2806.15 3459.19,2806.15 v2(3466,2812.96)
  Top Layer w18: U18.2@3422.03,3573.92 v2(3474.08,3573.92) ; v2(3495.6,2939.24) Q4.2@3495.6,2980.41
  Top Layer w30: C44.1@1511.46,2351.48 v1(1511.46,2308.44) 1511.46,2265.39 C45.1@1511.07,2265 1511.07,2207.19 U15.6@1524.6,2193.66 ; v2(1562,2042) U15.2@1562,2091.3 ; C7.1@1668.46,2563 v2(1721.86,2563) ; v2(1849,2616) C4.2@1849,2662.54 ; U17.1@2187.09,3560.61 2189,3562.52 v2(2189,3630) ; U16.1@2506.09,3555.61 v2(2506.09,3621.91) ; v2(2958.86,2249.14) R28.1@2958.86,2299.57 ; v2(3152.54,1556.54) SW1.3@3239.12,1556.54 ; D6.A@3365,2023.83 v2(3365,2067) ; SW1.4@3504.87,1556.54 v2(3587.54,1556.54) ; v2(3591.16,2303.16) R25.2@3591.16,2353 ; Q2.2@3746.6,2309.41 3759.29,2309.41 v2(3786,2282.7) ; v2(3974,1669.98) U8.2@3974,1749.26 ; U8.3@3974,2106.74 v2(3974,2177)
  Bottom Layer w14: 3028,2647.04 3033,2652.04 ; C14.1@3257.54,2551.07 C14.1@3257.7,2551.23
  Bottom Layer w30: C46.1@1511.07,2265 1511.46,2265.39 v1(1511.46,2308.44) C47.1@1511.46,2351.48 ; C51.1@2145.56,3583.61 2145.56,3630 ; C50.1@2145.56,3668.95 2145.56,3630 ; v2(2189,3630) 2145.56,3630 ; C49.1@2463.56,3576.61 2463.56,3622 ; C48.1@2463.56,3661.61 2463.56,3622 ; v2(2506.09,3621.91) 2463.65,3621.91 2463.56,3622 ; D5.A@2680,3812.83 v2(2680,3857) ; D4.A@2750,3590 v2(2750,3632) ; C21.1@2996.86,2652.04 3033,2652.04 C17.1@3063.85,2652.04 ; v2(3028,2623) 3028,2647.04 ; D2.A@3066.04,3815.67 v2(3066.04,3857.96) ; v2(3081.52,2370) 3080.86,2370.66 C20.1@3080.86,2419.11 C20.1@3081.52,2418.44 ; D3.A@3111.93,3590 3113,3591.07 3117.07,3587 v2(3153,3587) ; C16.1@3147.59,2419.11 3150,2416.7 v2(3150,2370) ; v2(3152,2935) 3179.32,2935 3180.32,2936 ; C18.1@3180.32,2895.57 3180.32,2936 ; C22.1@3180.32,2974.49 3180.32,2936 ; C15.1@3257.54,2485 C14.1@3257.54,2551.07 ; C14.1@3257.7,2551.23 3257.7,2577.7 v2(3280,2600) ; C19.1@3425.86,2781.38 3426.02,2781.54 3466,2781.54 ; v2(3466,2812.96) 3466,2781.54 ; C23.1@3507,2781.54 3466,2781.54
  other v1: 1324,1575 1359,1575 1394,1575 1254,1610 1289,1610 1324,1610 1359,1610 1394,1610 1254,1645 1289,1645 1324,1645 1359,1645 1394,1645 1254,1680 1289,1680 1324,1680 1359,1680 1394,1680 1254,1715 1570,1734.02 1608.5,1734.02 1646.99,1734.02 1685.49,1734.02 1730,1734.02 1770,1734.02 1810,1734.02 1850,1734.02 1254,1750 1254,1785 2354,1813 2389,1813 2424,1813 1254,1820 2284,1848 2319,1848 2354,1848 2389,1848 2424,1848 2284,1883 2319,1883 2354,1883 2389,1883 2424,1883 2284,1918 2319,1918 2354,1918 2389,1918 2424,1918 2284,1953 2605,1965 2643.5,1965 2681.99,1965 2720.49,1965 2765,1965 2805,1965 2845,1965 2885,1965 2284,1988 2284,2023 2284,2058 1747,2686 1776.5,2686 1806,2686 1563,2694 1592.5,2694 1622,2694 1605,2800.39 1605,2832 1652,2876 1695.5,2876 1739,2876 1652,2921.95 1737,2921.95 1652,2966 1695.5,2966 1739,2966 1571,3017 1565,3057 1533,3058 1380,3065.67 1428,3078 1533,3111 1410,3113 1465,3118 1563,3127 1439,3139 1662,3140 1540.65,3153 1407,3158 1466,3159 1571,3171 1661,3176 1714,3176 1775,3176 1844,3176 1440,3188 1540.65,3207 1466,3214 1407,3215 1713,3224 1774.5,3224 1841.33,3224 1563,3250 1713,3274 1773,3274 1842,3274 1540.65,3276 1458,3277 1407,3278 1434.04,3311 1540.65,3312 1405,3344 1453.72,3345 1538,3349 1385,3386 1540,3396 1415,3418 1584,3418 1390,3443 1417,3468 1586,3470 1418,3525 1586,3529 1647,3562 1363.19,3562.52 1420.85,3592 1586.29,3596 1470,3597 1531.19,3597 1471,3653 1532,3653 1467,3721 1531.19,3721 1444,3769.85 1552.49,3770 1364,3787 1646.12,3787 1446,3826 1546,3826 1500,3851 1502.63,3934
  other v2: 2202,1225 2280.33,1225 2358.67,1225 2437,1225 3109,1238 3169,1238 3228,1238 3109,1297 3228,1298 2202,1299.25 2437,1299.25 3109,1357 3167,1357 3228,1357 2280.33,1373 2358.67,1373 2437,1373 2202,1373.5
NetC2_2: C2.2 U1.27 | length 97.5
  Top Layer w14: U1.27@1724.86,3018.21 1724.86,3041.11 1771.33,3087.58 C2.2@1771.33,3096.49
NetC3_2: C3.2 U1.28 | length 78.3
  Top Layer w14: U1.28@1705.17,3018.21 C3.2@1705.17,3096.49
NetC5_1: C5.1 C6.2 U2.5 | length 145.6
  Top Layer w14: U2.5@1500.97,3454.82 1500.97,3386 1501.5,3385.46 1501.5,3309.46
NetC5_2: C5.2 L2.1 | length 68
  Top Layer w14: L2.1@1501.5,3174.5 1501.5,3242.54
NetC8_2: C8.2 L1.1 L2.2 U1.31 | length 244.2
  Top Layer w14: L2.2@1501.5,3137.5 C8.2@1501.5,3081.53 1612.47,3081.53 1646.12,3047.88 U1.31@1646.12,3018.21
NetC9_1: C9.1 C12.1 U1.6 | length 219.4
  Top Layer w14: C12.1@1451.26,2796.5 1517.82,2796.5 C9.1@1517.82,2797.04 1517.82,2839.82 1545,2867 1545,2878 1559.42,2892.42 U1.6@1599.07,2892.42
NetC9_2: C9.2 R6.2 U1.7 | length 241.7
  Top Layer w14: R6.2@1517.82,2678.53 1517.82,2757.82 1533.62,2773.62 1534.99,2773.62 1565,2803.63 1565,2861 1576.74,2872.74 U1.7@1599.07,2872.74
NetC10_1: C10.1 R7.2 | length 71.2
  Top Layer w14: C10.1@1603.33,3270.04 1618.29,3285 R7.2@1668.33,3285
NetC10_2: C10.2 L1.2 U1.29 | length 248.8
  Top Layer w14: C10.2@1603.53,3233.03 1603.53,3130.1 1651,3082.63 1651,3072.49 1685.49,3038 U1.29@1685.49,3018.21
NetC11_2: C11.2 L3.1 L4.1 U1.3 | length 274.4
  Top Layer w14: L4.1@1464.5,2892.42 1464.5,2951.48 1466.19,2953.16 1466.19,2983.81 ; C11.2@1475.5,3016 1475.5,2993.12 1466.19,2983.81 ; U1.3@1599.07,2951.48 1578.52,2951.48 1546.19,2983.81 1466.19,2983.81
NetC12_2: C12.2 R6.1 | length 66.6
  Top Layer w14: R6.1@1450.89,2678.53 1452.26,2679.9 1452.26,2744.54
NetC13_2: C13.2 R25.1 | length 71
  Top Layer w12: C13.2@3523,2423.54 3523,2354.23 R25.1@3524.23,2353
NetC14_2: C14.2 C15.2 FB1.2 U12.9 | length 241.2
  Top Layer w12: U12.9@3297.07,2551.23 3297.07,2582.07 3314,2599 v1(3319,2599)
  Bottom Layer w12: v1(3319,2599) v1@3324.63,2593.37 ; C15.2@3324.46,2485 C15.2@3324.46,2485 ; C14.2@3324.46,2551.07 C14.2@3324.63,2551.23
  Bottom Layer w30: C15.2@3324.46,2485 C14.2@3324.46,2551.07 ; FB1.2@3324.51,2420 C15.2@3324.46,2485 ; C14.2@3324.63,2551.23 v1@3324.63,2593.37
NetC29_1: C29.1 R29.1 R31.2 U13.16 | length 192.9
  Top Layer w12: R29.1@1255.91,1473.56 R29.1@1257,1472.46
  Top Layer w18: R29.1@1255.91,1473.56 U13.16@1255.91,1537.68
  Top Layer w30: C29.1@1193,1472.46 R29.1@1257,1472.46 1319.64,1472.46 R31.2@1320.08,1472.91
NetC39_1: C39.1 R32.1 R34.2 U14.16 | length 193.5
  Top Layer w18: R32.1@2282,1702.46 R32.1@2283,1703.46 2283.95,1704.42 U14.16@2283.95,1771.14
  Top Layer w30: C39.1@2220.06,1702.46 R32.1@2282,1702.46 ; R32.1@2283,1703.46 2343.25,1703.46 R34.2@2344.54,1704.75
NetD1_1: D1.1 R10.1 U8.4 U12.19 | length 1517.5
  Top Layer w12: U12.19@3414.2,2727.41 3416.79,2730 3500,2730 3650,2580 3650,2330.74 U8.4@3874,2106.74
  Top Layer w30: R10.1@3695.46,1994 3761.26,1994 3778.46,2011.2 ; D1.1@3778.46,1584 3778.46,2011.2 ; U8.4@3874,2106.74 3778.46,2011.2
NetD1_2: D1.2 R11.2 | length 349.7
  Top Layer w30: R11.2@3695.46,1927 3695.46,1600.07 D1.2@3711.54,1584
NetD2_C: D2.C J4.2 R16.2 | length 467.1
  Top Layer w12: R16.2@3090,3353.46 v1(3090,3430)
  Bottom Layer w12: J4.2@2980,3775.04 3066.04,3689.01 D2.C@3066.04,3670 3066.04,3550 3090,3526.04 v1(3090,3430)
NetD3_C: D3.C J4.4 R15.2 | length 457.7
  Top Layer w12: R15.2@3017.21,3353.46 v1(3017.21,3430)
  Bottom Layer w12: J4.4@2930,3775.04 2966.26,3738.79 D3.C@2966.26,3590 3017.21,3539.05 v1(3017.21,3430)
NetD4_C: D4.C J4.6 R14.2 | length 448.3
  Top Layer w12: R14.2@2944.42,3353.46 v1(2944.42,3430)
  Bottom Layer w12: J4.6@2880,3775.04 2895.67,3759.37 D4.C@2895.67,3590 2944.42,3541.25 v1(2944.42,3430)
NetD5_C: D5.C J4.10 R13.2 | length 576.4
  Top Layer w12: R13.2@2871.63,3353.46 v1(2871.63,3428.37)
  Bottom Layer w12: J4.10@2780,3775.04 2780,3767.17 D5.C@2680,3667.17 2680,3562 2715.96,3526.04 2773.96,3526.04 v1(2871.63,3428.37)
NetD6_C: D6.C R23.1 R24.2 SW1.1 SW1.2 | length 679.9
  Top Layer w12: R23.1@3129,1885.54 R24.2@3243,1885.54 ; D6.C@3365,1878.17 3250.37,1878.17 R24.2@3243,1885.54 ; SW1.2@3504.87,1712.06 SW1.1@3239.12,1712.06 3239.12,1881.65 R24.2@3243,1885.54
NetD7_1: D7.1 FB2.2 U16.2 | length 252
  Top Layer w12: U16.2@2456.09,3555.61 2467.9,3567.41 D7.1@2467.9,3743.61 2467.9,3802.29 FB2.2@2467.58,3802.61
NetD7_2: D7.2 FB3.2 U16.3 | length 252.6
  Top Layer w12: FB3.2@2392.6,3802.61 2392.6,3744.1 D7.2@2393.09,3743.61 2393.09,3568.61 U16.3@2406.09,3555.61
NetD8_1: D8.1 FB4.2 U17.2 | length 247.4
  Top Layer w12: U17.2@2137.09,3560.61 2149.9,3573.41 D8.1@2149.9,3747.61 2150.09,3747.81 FB4.2@2150.09,3802.61
NetD8_2: D8.2 FB5.2 U17.3 | length 247
  Top Layer w12: FB5.2@2075.09,3802.61 D8.2@2075.09,3747.61 2075.09,3572.61 U17.3@2087.09,3560.61
NetFB2_1: FB2.1 J7.2 | length 130.5
  Top Layer w12: J7.2@2479.09,3912.61 2528.6,3863.1 FB2.1@2528.6,3802.61
NetFB3_1: FB3.1 J7.1 | length 129.7
  Top Layer w12: FB3.1@2331.58,3802.61 2331.58,3865.1 J7.1@2379.09,3912.61
NetFB4_1: FB4.1 J8.2 | length 127.2
  Top Layer w12: J8.2@2167.09,3911.61 2211.12,3867.58 FB4.1@2211.12,3802.61
NetFB5_1: FB5.1 J8.1 | length 131
  Top Layer w12: FB5.1@2014.07,3802.61 2014.07,3858.58 J8.1@2067.09,3911.61
NetJ9_4: J9.4 R39.2 | length 202
  Top Layer w12: R39.2@3222.14,3653.46 3276.3,3653.46 3332.85,3710.01 J9.4@3332.85,3777.92
NetL3_2: L3.2 U1.4 | length 91.5
  Top Layer w14: L3.2@1515.68,2951.48 1535.37,2931.79 U1.4@1599.07,2931.79
NetL4_2: L4.2 U1.5 | length 91.5
  Top Layer w14: L4.2@1515.68,2892.42 1535.37,2912.11 U1.5@1599.07,2912.11
NetQ2_1: Q2.1 U12.22 | length 615.1
  Top Layer w12: U12.22@3414.2,2786.47 3445.41,2786.47 3470.87,2761 3527.67,2761 3680,2608.67 3680,2427.19 Q2.1@3746.6,2360.59
NetQ2_3: Q2.3 U3.2 | length 119.1
  Top Layer w12: Q2.3@3821.4,2335 3824.4,2332 U3.2@3939.26,2332
NetQ3_2: Q3.2 R9.2 | length 110.9
  Top Layer w30: Q3.2@4108.59,1520.6 4116.93,1528.94 R9.2@4216,1528.94
NetQ4_1: Q4.1 U12.25 | length 227.7
  Top Layer w12: U12.25@3356.13,2883.91 3356.13,2930.03 3457.69,3031.59 Q4.1@3495.6,3031.59
NetQ4_3: Q4.3 U10.1 | length 834.7
  Top Layer w30: Q4.3@3570.4,3006 3698.34,2878.06 4198.06,2878.06 U10.1@4307,2987
NetR1_1: R1.1 R2.1 U1.20 | length 456.7
  Top Layer w12: U1.20@1791.59,2912.11 1883.08,2912.11 1892.04,2921.06 R1.1@2180.63,2921.06 R2.1@2180.63,2857.06
NetR2_2: R2.2 U12.10 | length 1244.4
  Top Layer w12: R2.2@2247.56,2857.06 2261.24,2843.37 2349.84,2843.37 2659.41,2533.8 3017.42,2533.8 3039.53,2511.69 3304.07,2511.69 3316.66,2524.28 3316.66,2551.14 U12.10@3316.76,2551.23
NetR3_2: R3.2 U1.19 | length 156.2
  Top Layer w12: U1.19@1791.59,2892.42 1791.9,2892.74 1926.95,2892.74 R3.2@1941.63,2878.06
NetR4_1: R4.1 U1.14 U12.12 | length 1865
  Top Layer w12: U1.14@1724.86,2825.69 1724.86,2800.39 1745.86,2779.39 1859.96,2779.39 1879.96,2759.39 1900.38,2759.39 1969.63,2690.14 R4.1@1969.63,2679.06 1971.6,2679.06 2105.8,2544.86 2547.67,2544.86 2635.3,2457.22 3297.69,2457.22 3356.03,2515.56 3356.03,2551.14 U12.12@3356.13,2551.23
NetR5_1: R5.1 U1.15 U12.11 | length 1780.7
  Top Layer w12: U1.15@1744.54,2825.69 1744.54,2808.56 1755,2798.1 1865.29,2798.1 1887,2776.39 2052.13,2776.39 R5.1@2153.13,2675.39 2247.88,2580.64 2562.23,2580.64 2648.18,2494.69 3311.12,2494.69 3336.35,2519.92 3336.35,2551.14 U12.11@3336.44,2551.23
NetR8_2: R8.2 U3.1 | length 105.8
  Top Layer w12: R8.2@3833.46,2432 U3.1@3939.26,2432
NetR9_1: R9.1 U8.1 | length 433
  Top Layer w30: U8.1@3874,1749.26 3874,1809.59 3914.41,1850 4182.34,1850 R9.1@4216,1816.34
NetR14_1: R14.1 U12.39 | length 572.6
  Top Layer w12: R14.1@2944.42,3286.54 2944.42,2896.71 3051.88,2789.25 3078.74,2789.25 U12.39@3081.52,2786.47
NetR15_1: R15.1 R17.1 U12.37 | length 487.3
  Top Layer w12: R15.1@3017.21,3286.54 3017.21,3047.15 R17.1@3017.42,3046.94 3081.52,2982.83 U12.37@3081.52,2825.84
NetR16_1: R16.1 U12.34 | length 445.1
  Top Layer w12: R16.1@3090,3286.54 3090,3060 3178.87,2971.13 U12.34@3178.87,2878.23
NetR22_1: R22.1 U10.8 | length 409
  Top Layer w30: R22.1@3563.46,3145 3749,3145 U10.8@3907,2987
NetR27_1: R27.1 SW2.3 | length 87
  Top Layer w12: R27.1@2791.32,2299.57 2791.86,2300.11 SW2.3@2791.86,2386.37
NetR28_2: R28.2 SW2.4 | length 86.8
  Top Layer w12: SW2.4@2891.86,2386.37 R28.2@2891.93,2299.57 R28.2@2891.93,2299.57
NetR30_1: R30.1 R31.1 U13.1 | length 136.6
  Top Layer w30: R31.1@1387.01,1472.91 R30.1@1456.33,1472.91 1456.33,1528.82 1456.33,1540.18
NetR30_2: R30.2 U13.3 | length 178.7
  Top Layer w12: U13.3@1457.7,1599.64 1500.04,1599.64 1523.26,1576.42 R30.2@1523.26,1472.91
NetR33_1: R33.1 R34.1 U14.1 | length 132
  Top Layer w30: R34.1@2411.46,1704.75 R33.1@2487.54,1704.75 2487.54,1760.66
NetR33_2: R33.2 U14.3 | length 183.6
  Top Layer w14: U14.3@2486.91,1833.15 2533.32,1833.15 2554.46,1812 R33.2@2554.46,1704.75
NetR35_1: R35.1 U12.30 U15.3 | length 2289.1
  Top Layer w12: U15.3@1599.4,2091.3 1602.7,2088 R35.1@1690.54,2088 1690.54,2089.54 v1(1898,2297) ; v1(3217,2654) 3217,2795 3257.7,2835.7 U12.30@3257.7,2883.91
  Bottom Layer w12: v1(1898,2297) 3181,2297 3217,2333 v1(3217,2654)
NetR36_1: R36.1 U12.31 U15.4 | length 2203.3
  Top Layer w12: U15.4@1599.4,2193.66 1600.53,2192.54 R36.1@1688,2192.54 1742.54,2192.54 v1(1895,2345) ; v1(3189,2656) 3189,2798 3238.02,2847.02 U12.31@3238.02,2883.91
  Bottom Layer w12: v1(1895,2345) 1896,2344 3171,2344 3189,2362 v1(3189,2656)
NetR37_1: R37.1 U12.40 U16.6 | length 965.1
  Top Layer w12: U16.6@2406.09,3369.61 2406.09,3301.44 R37.1@2468.54,3239 2527.54,3180 2600,3180 3013.22,2766.78 U12.40@3081.52,2766.78
NetR38_1: R38.1 U12.41 U17.6 | length 1582
  Top Layer w12: U17.6@2087.09,3374.61 2087,3374.52 2087,3425 2068,3444 2028,3444 1997,3413 1997,3310 2071.33,3235.67 R38.1@2136.63,3235.67 2232.3,3140 2580,3140 2972.9,2747.1 U12.41@3081.52,2747.1
NetRFIO1_1: RFIO1.1 U2.2 | length 228.8
  Top Layer w14: U2.2@1500.97,3557.18 RFIO1.1@1500.97,3786
NetSW2_1: SW2.1 SW2.2 U12.44 | length 309.8
  Top Layer w12: SW2.2@2791.86,2736.77 SW2.1@2891.86,2736.77 2941.23,2736.77 2989.96,2688.04 U12.44@3081.52,2688.04
NetU1_16: U1.16 U12.16 | length 1837.8
  Top Layer w12: U1.16@1764.23,2825.69 1869.7,2825.69 1894,2801.39 2076.61,2801.39 2167.61,2710.39 v1@2369.58,2710.39 ; v1(3331.64,2668.36) U12.16@3414.2,2668.36
  Bottom Layer w12: v1(2371,2710) 2423,2710 2514,2619 2679,2619 2689.2,2619 2696,2625.8 2696,2644.59 2702.8,2651.39 2723.2,2651.39 2730,2644.59 2730,2625.8 2736.8,2619 2756,2619 2757,2619 2888,2619 2979,2710 3290,2710 v1(3331.64,2668.36)
NetU1_17: U1.17 U12.17 | length 1837.8
  Top Layer w12: U1.17@1791.59,2853.05 1876.34,2853.05 1904.38,2825 2099.38,2825 2174,2750.39 v1@2369.58,2750.39 ; v1(3351.55,2700) 3353.17,2700 3365.13,2688.04 U12.17@3414.2,2688.04
  Bottom Layer w12: v1(2371,2750) 2467,2750 2534,2683 2677,2683 2687.2,2683 2694,2689.8 2694,2730.62 2700.8,2737.42 2721.2,2737.42 2728,2730.62 2728,2689.8 2734.8,2683 2751,2683 2859,2683 2926,2750 3300,2750 3350,2700 v1(3351.55,2700)
NetU1_18: U1.18 U12.15 | length 1837.2
  Top Layer w12: U1.18@1791.59,2872.74 1890.06,2872.74 1915.42,2847.37 2115.01,2847.37 2177.42,2784.96 v1@2369.58,2784.96 ; U12.15@3414.2,2648.67 3414.29,2648.77 3441.15,2648.77 3465.72,2673.33 v1(3465.72,2710)
  Bottom Layer w12: v1(2372,2784) 3296.05,2784 3321.25,2758.8 3321.25,2758.58 3369.83,2710 v1(3465.72,2710)
NetU1_21: U1.21 U12.2 | length 1580.6
  Top Layer w12: U1.21@1791.59,2931.79 1859.2,2931.79 1879.15,2951.74 2291.82,2951.74 2680.56,2563 3092,2563 3119.78,2590.78 3146.59,2590.78 3159.18,2578.19 3159.18,2551.33 U12.2@3159.28,2551.23
NetU1_22: U1.22 U12.46 | length 1435.6
  Top Layer w12: U1.22@1791.59,2951.48 1854.84,2951.48 1876.95,2973.58 2320.33,2973.58 2647.55,2646.36 2986.16,2646.36 2988.48,2648.67 U12.46@3081.52,2648.67
NetU1_23: U1.23 U12.45 | length 1436.5
  Top Layer w12: U1.23@1791.59,2971.16 1850.48,2971.16 1875.32,2996 2385.23,2996 2712.87,2668.36 3016.81,2668.36 3017.44,2668.99 3080.89,2668.99 U12.45@3081.52,2668.36
NetU12_21: U12.21 U16.5 U17.5 | length 1765.6
  Top Layer w12: U17.5@2037.09,3374.61 2037.09,3322.5 2079.59,3280 v1(2396.09,3280) 2356.09,3320 U16.5@2356.09,3369.61 ; v1(3340,2800) 3373.22,2766.78 U12.21@3414.2,2766.78
  Bottom Layer w12: v1(2396.09,3280) 2619,3280 3085,2814 3326,2814 v1(3340,2800)
NetU12_27: U12.27 U16.7 U17.7 | length 1598.2
  Top Layer w12: U17.7@2137.09,3374.61 2137.09,3422.15 2154.94,3440 2480,3440 ; U16.7@2456.09,3369.61 2456.09,3416.09 2480,3440 ; v1(2730,3300) 2590,3440 2480,3440 ; U12.27@3316.76,2883.91 v1(3316.76,2974.36)
  Bottom Layer w12: v1(2730,3300) 2991.12,3300 v1(3316.76,2974.36)
PSENSOR: J6.2 U15.1 | length 314.5
  Top Layer w30: J6.2@1277,2252.85 1438.55,2091.3 U15.1@1524.6,2091.3
RSTNET: C13.1 R13.1 R24.1 U12.7 | length 1996
  Top Layer w12: R13.1@2871.63,3286.54 2871.63,3066.37 2904,3034 v1(2905,3034) ; R24.1@3243,1952.46 3243,2210.46 C13.1@3523,2490.46 3476.54,2490.46 3344,2623 3260.7,2623 3257.7,2620 ; U12.7@3257.7,2551.23 3257,2551.93 3257,2619.3 3257.7,2620 ; v1(3280,2838) 3280,2814.3 3257.7,2792 3257.7,2620
  Bottom Layer w12: v1(2905,3034) 3102,2837 3103,2838 v1(3280,2838)
TopTheiving: 
USB5V: J9.1 U18.5 | length 352.4
  Top Layer w12: v1(3271.91,3573.92) U18.5@3320.03,3573.92 ; J9.1@3409.62,3777.92 3409.62,3690.38 v1(3425,3675)
  Bottom Layer w12: v1(3271.91,3573.92) 3323.92,3573.92 v1(3425,3675)
USB_N: U12.32 U18.1 | length 781
  Top Layer w14: U12.32@3218.33,2883.91 3219.65,2883.91 3220.02,2884.28 3220.02,2891.36 3220.11,2891.46 3220.11,2913.96 3228.87,2922.72 3228.87,3001.24 3352.03,3124.4 3352.03,3256.29 3316.43,3291.89 3316.43,3309.03 3352.03,3344.63 3352.03,3436.93 3387.03,3471.93 3387.03,3524.72 3395.23,3532.92 3418.03,3532.92 U18.1@3422.03,3536.92
USB_P: U12.33 U18.6 | length 776.6
  Top Layer w14: U12.33@3198.65,2883.91 3196.87,2885.69 3196.87,3014.5 3320.03,3137.66 3320.03,3243.03 3284.43,3278.63 3284.43,3322.29 3320.03,3357.89 3320.03,3450.19 3355.03,3485.19 3355.03,3524.72 3346.83,3532.92 3324.03,3532.92 U18.6@3320.03,3536.92
USBOUT_N: J9.2 U18.3 | length 197.5
  Top Layer w14: J9.2@3384.03,3777.92 3386.44,3777.92 3387.03,3777.33 3387.03,3623.12 3395.23,3614.92 3418.03,3614.92 U18.3@3422.03,3610.92
USBOUT_P: J9.3 U18.4 | length 196.3
  Top Layer w14: U18.4@3320.03,3610.92 3324.03,3614.92 3346.83,3614.92 3355.03,3623.12 3355.03,3774.51 J9.3@3358.44,3777.92
XTALM: C4.1 Q1.3 U1.11 | length 281.4
  Top Layer w12: U1.11@1665.8,2825.69 1665.8,2807.2 1684,2789 1684,2738 1706,2716 1752.37,2716 Q1.3@1773.61,2737.24 1841.22,2737.24 C4.1@1849,2729.46
XTALP: C7.2 Q1.1 U1.10 | length 278.5
  Top Layer w12: Q1.1@1600.39,2642.76 1600.39,2568.15 C7.2@1601.54,2567 ; Q1.1@1603.48,2643.29 1648.79,2688.6 1648.79,2823.02 U1.10@1646.12,2825.69
pads on no net: J4.7 J4.8 J9.None J9.P1 J9.P2 J9.P3 J9.P4 J9.P5 J9.P6 U1.13 U10.5 U10.6 U12.3 U12.4 U12.5 U12.6 U12.13 U12.14 U12.18 U12.20 U12.26 U12.28 U12.29 U12.38 U12.42 U12.43 U13.12 U13.13 U13.17 U14.12 U14.13 U14.17 U16.8 U17.8

## Polygon pours and split planes (outlines as drawn)
GND on LGND "LGND-GND" (solid, pour order 49): 1005,3997 3650,3997 3650,2730 4110,2730 4110,1005 1005,1005
FANGND on LGND "FANGNDLAYER" (solid, pour order 121): 4996.75,2701 4141,2701 4141,1388 4143,1386 4998.75,1386
GND on LGND "LGND-GND 1" (solid, pour order 117): 4077,1929 4303,1929 4297,1923 4297,1471 4460,1471 4462,1469 4458,1465 4458,1000 4077,1000
"AC In" on LGND "LGND-AC In" (solid, pour order 34): 4700,3425 4950,3425 4950,2900 4750,2900 4750,3250 4700,3250
ACFUSE on LGND "LGND-ACFUSE" (solid, pour order 33): 4150,3500 4450,3500 4450,3450 4701.5,3198.5 4701.5,2901.5 4700,2900 4500,2900 4500,3150 4450,3200 4145.48,3200 4145.48,3495.48
"AC Out" on LGND "LGND-AC Out" (solid, pour order 32): 4145.48,3803.81 4620.48,3803.81 4620.48,3653.81 4945.48,3653.81 4945.48,3478.81 4495.48,3478.81 4495.48,3555.23 4145.48,3555.23
+12V on LPWR "LPWR-+12V" (solid, pour order 51): 1430,1650 2050,1650 2050,1528.94 2051.06,1530 2460,1530 2460,1880 3050,1880 3050,1470 4460,1470 4460,1027 1420.42,1027
+3V3 on LPWR "LPWR-+3V3" (solid, pour order 53): 1025,3969 3650,3969 3650,2730 4110,2730 4110,1930 3766.77,1930 3766.77,1470 3050,1470 3050,2050 2580,2050 2500,1970 2330,1970 2330,2090 2325.24,2094.76 2255.53,2094.76 2255.53,1530 2051.06,1530 2051.06,1648.94 2050,1650 1920,1650 1920,2040 1630,2040 1630,2430 1450,2430 1450,2550 1025,2550